# Altium PCB 5111HB015.pcbdoc (part 1 of 2)
Units mm, origin at the board's own origin, x right, y up, seen from the top; angles counter-clockwise.
Board outline 113.23 x 111.63 mm, 4 copper layers (Top Layer, Top, MID1, MID2, Bottom Layer, Bottom), stack 1.189 mm thick; 90 components, 53 nets, 462 pads, 255 vias.
Unrouted connection lines stored in the file: 24.
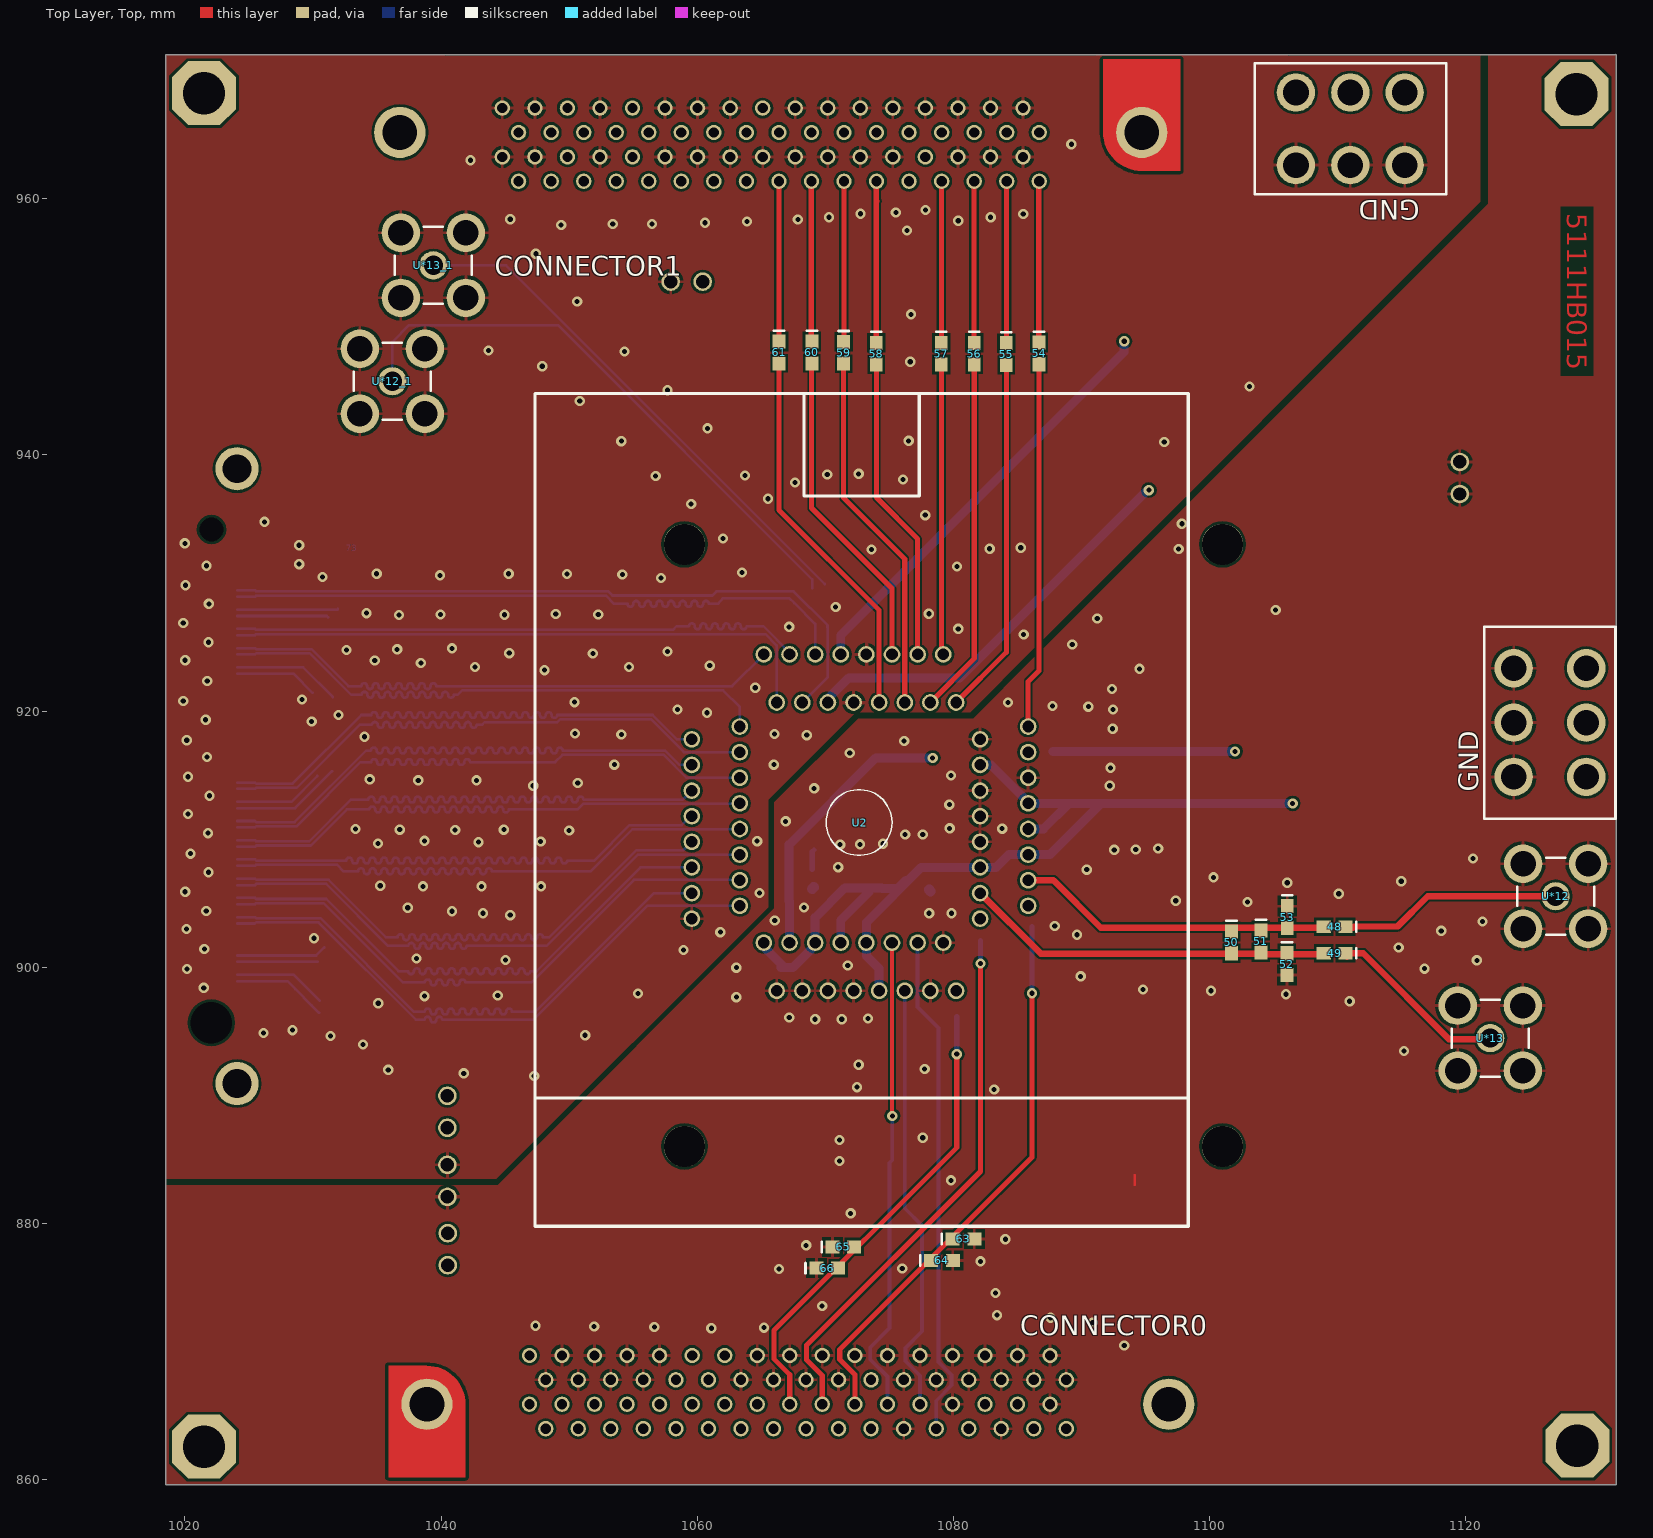
[diagram p0: Top Layer, Top view]
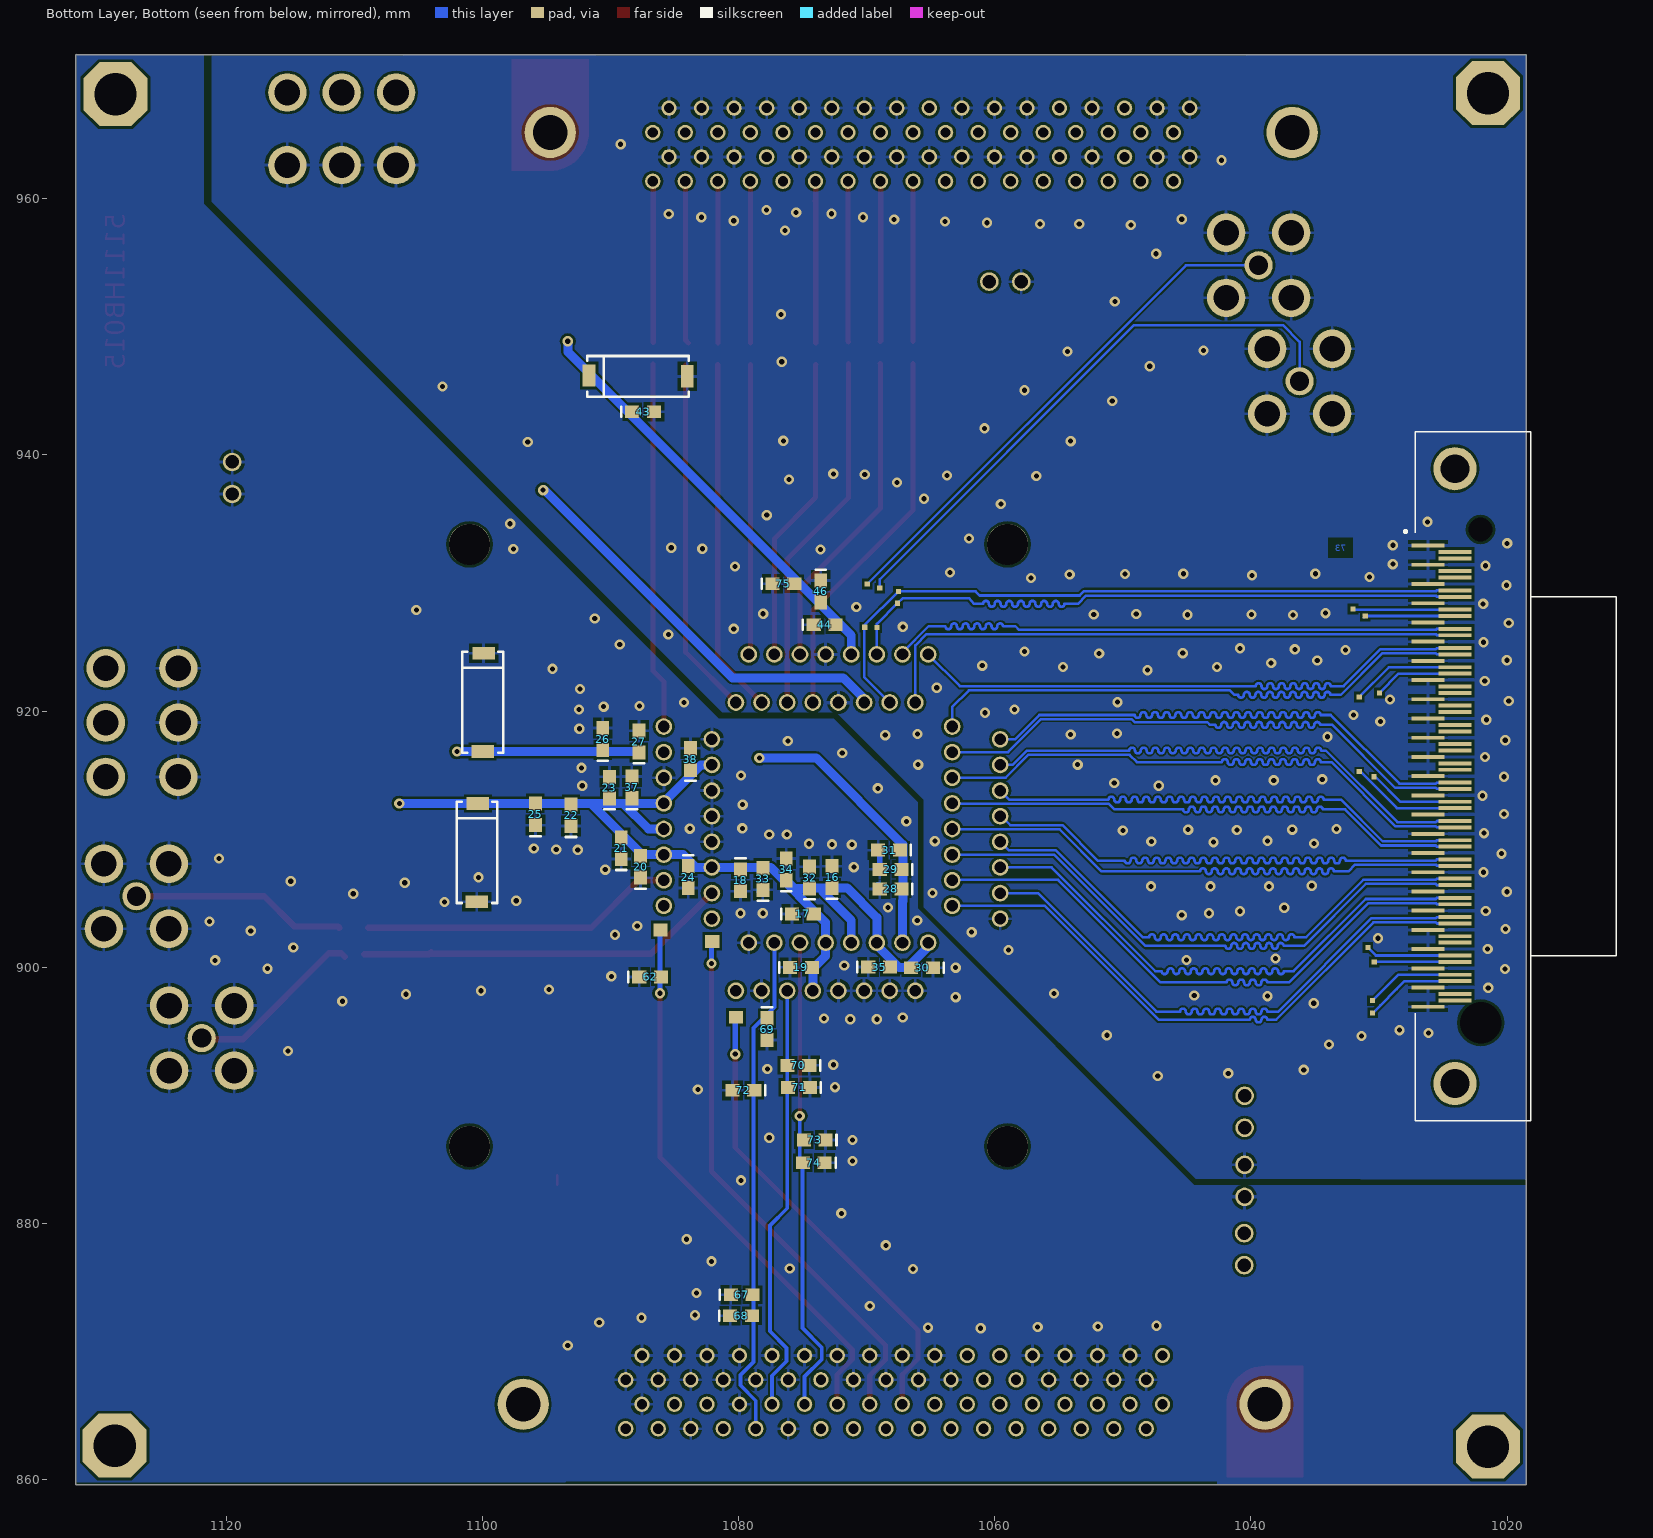
[diagram p1: Bottom Layer, Bottom view, seen from below]
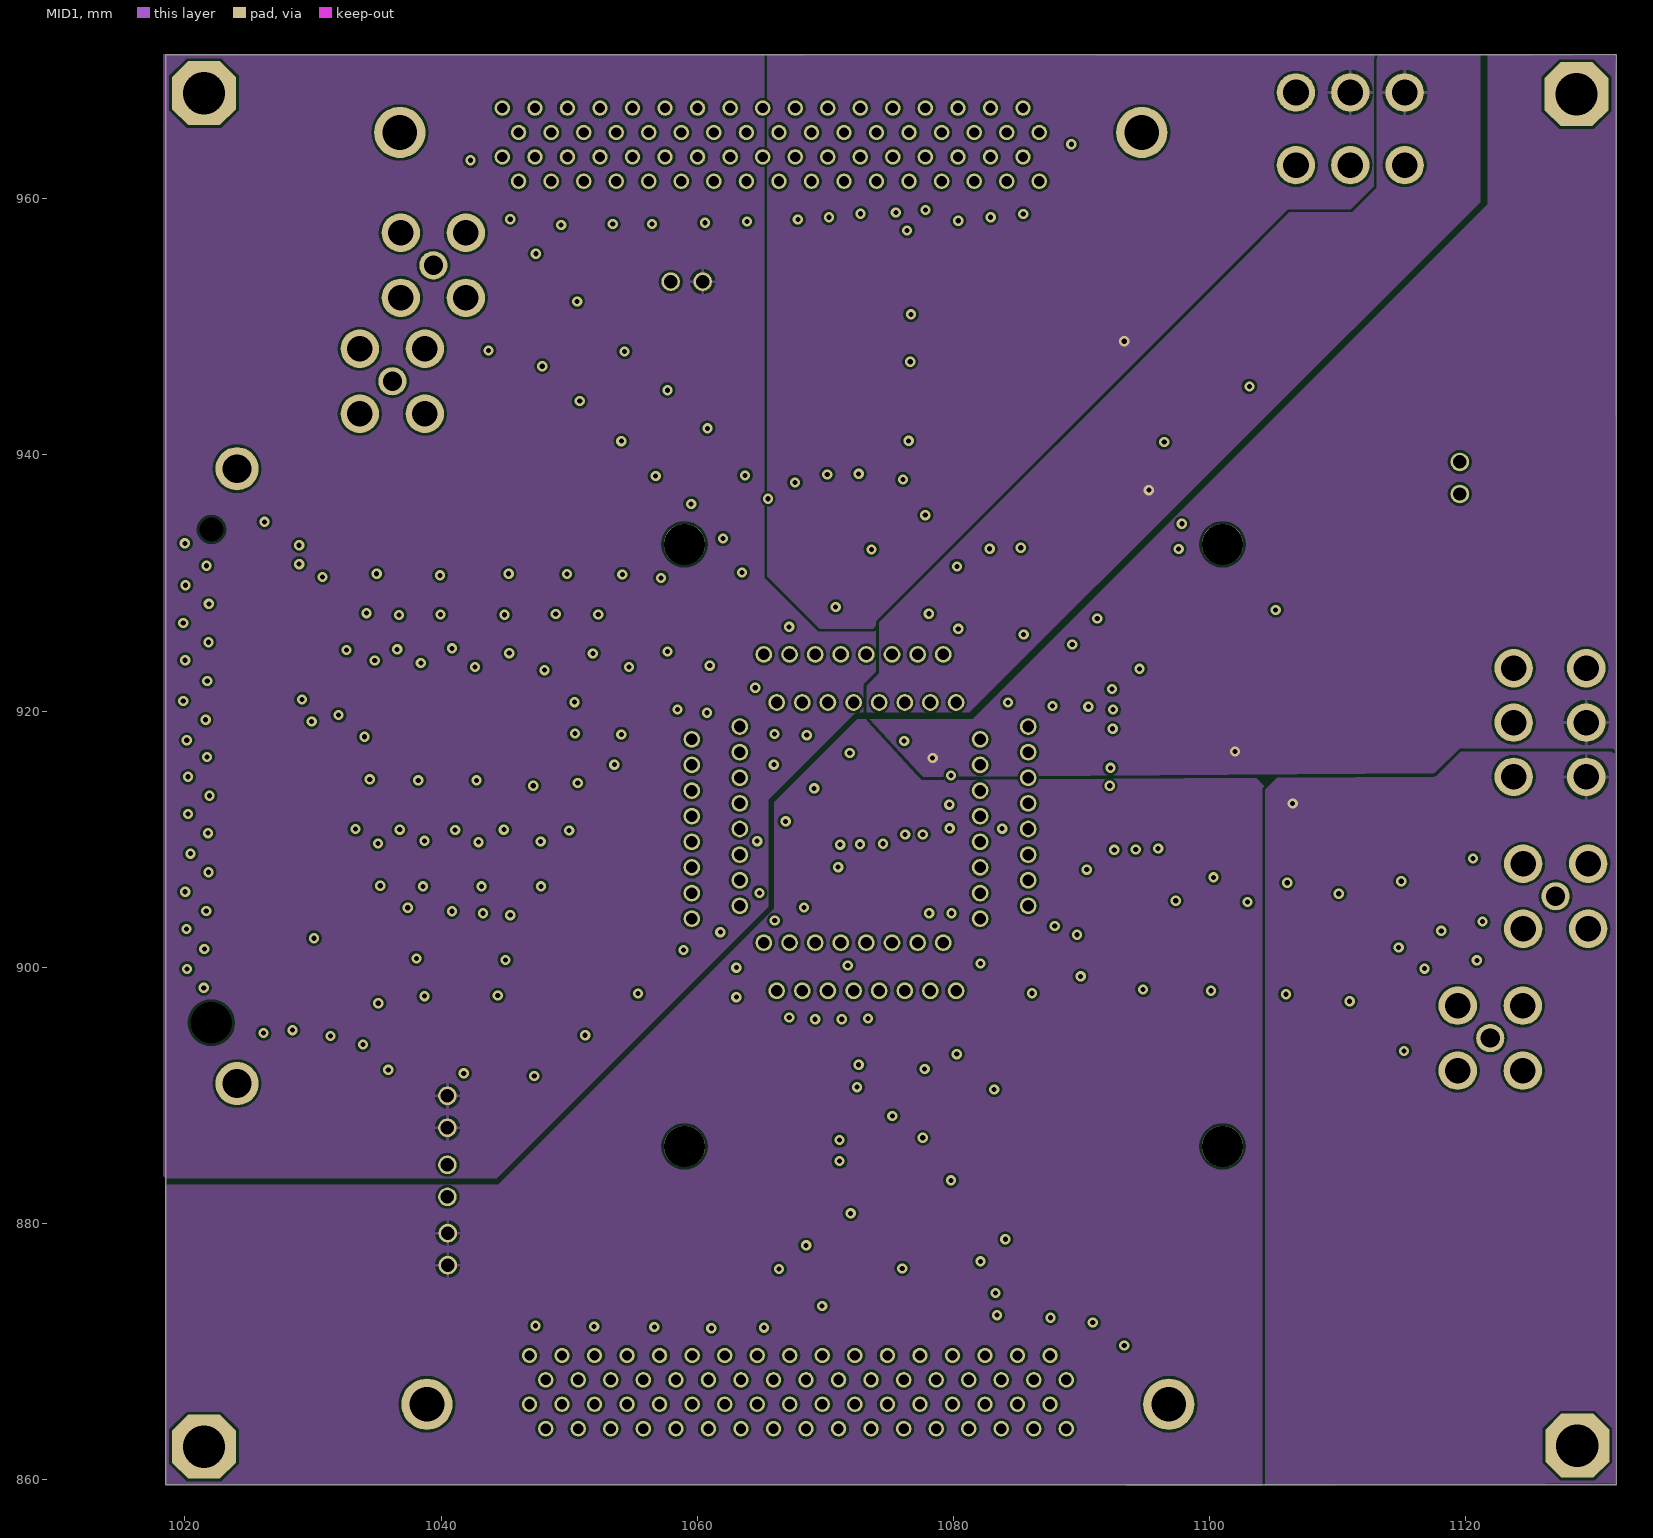
[diagram p2: MID1]
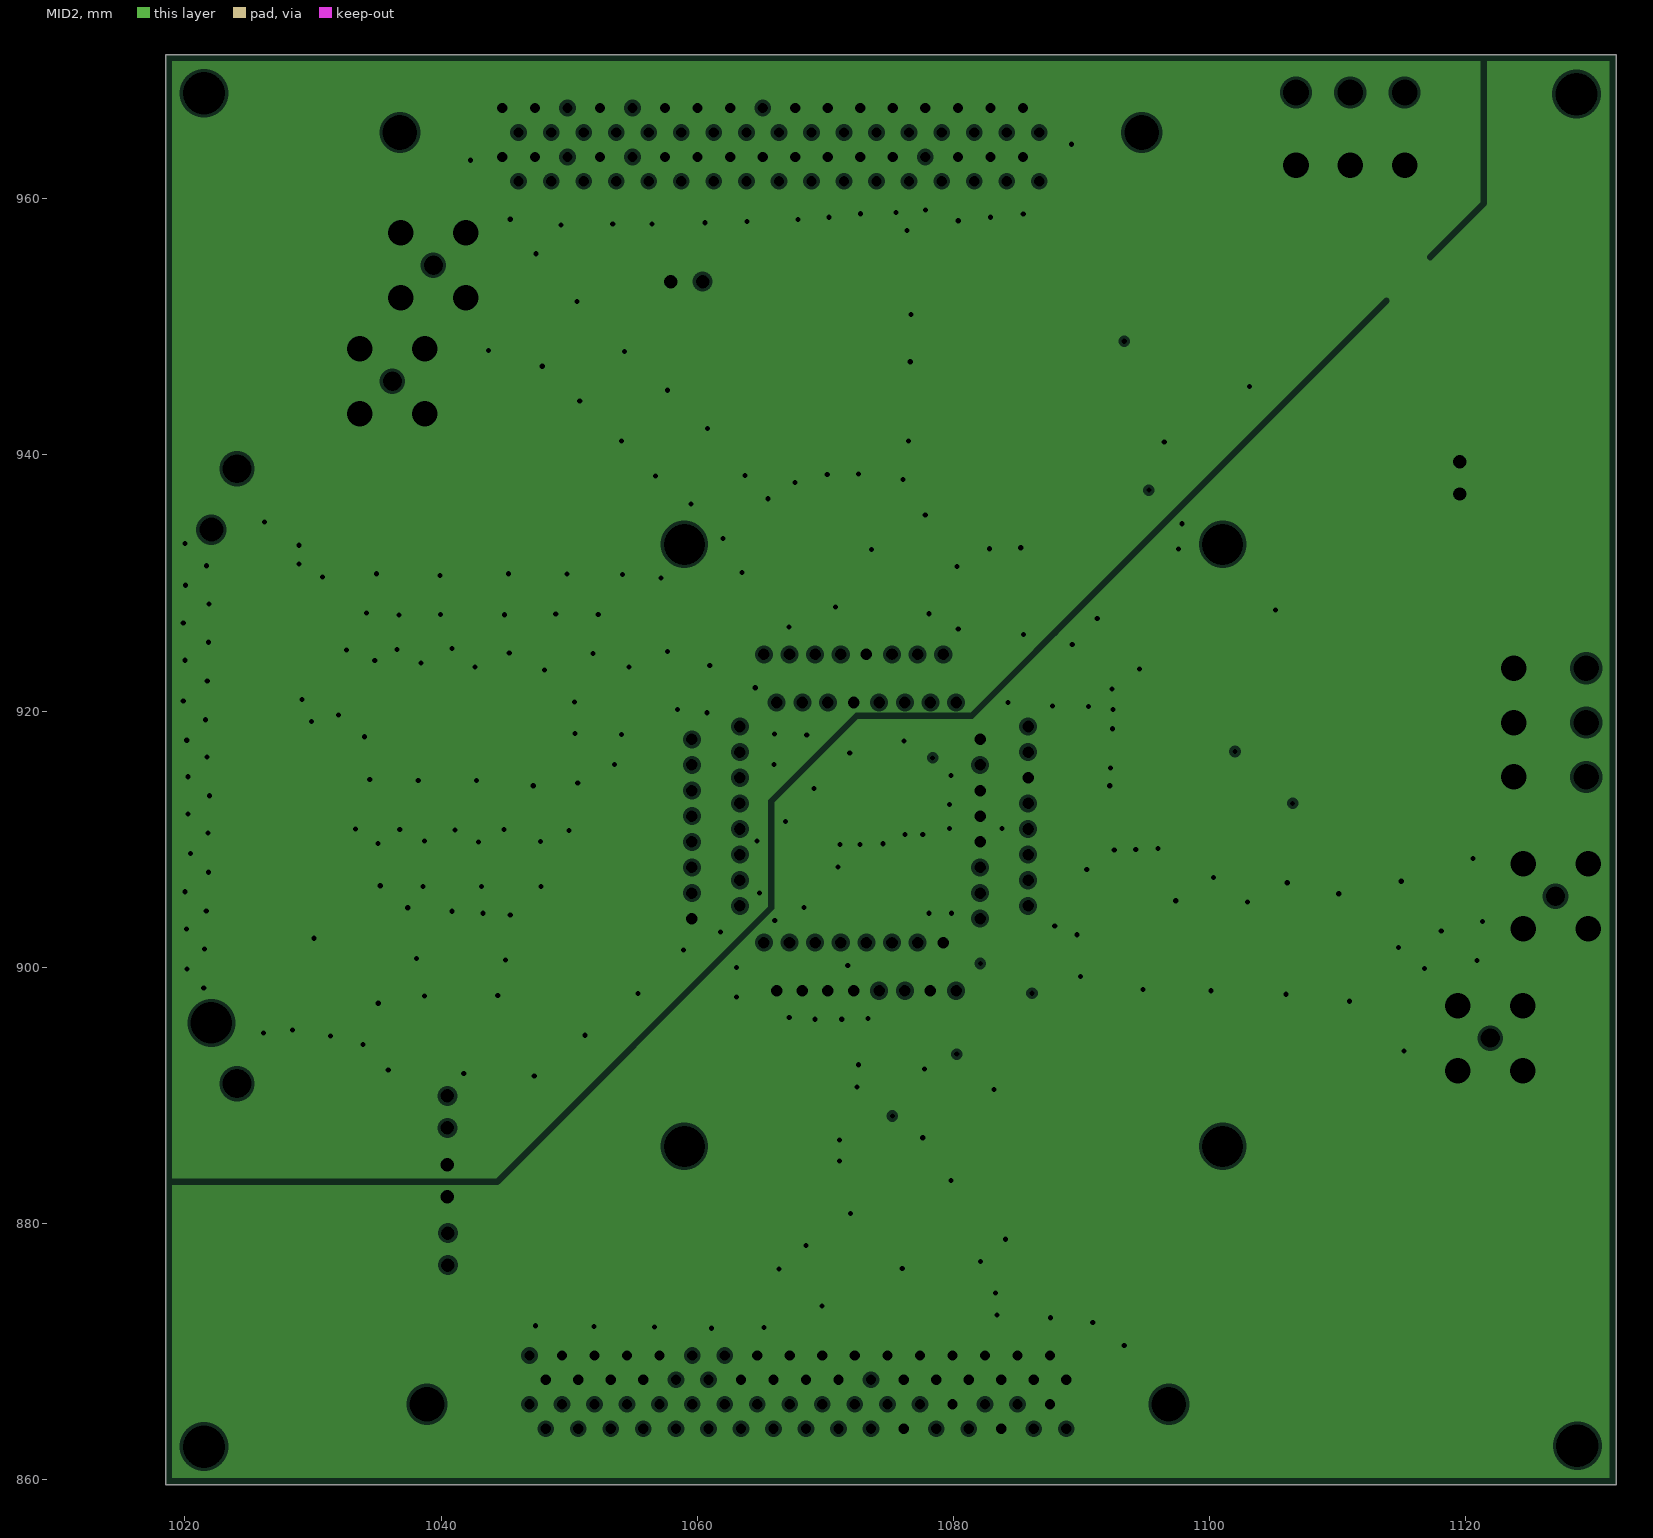
[diagram p3: MID2, clearances drawn from the general rule]

## Layer stack, top to bottom
Top Solder, Top Mask: solder mask 0.0102, Solder Resist, Dk 3.5
Top Layer, Top: signal copper 0.018
CORE1: core 0.7, FR-4, Dk 4.2
MID1: signal copper 0.036
Dielectric 3: prepreg 0.127, Dk 4.2
MID2: plane copper 0.036, net DGND
CORE2: core 0.254, FR-4, Dk 4.2
Bottom Layer, Bottom: signal copper 0.018
Bottom Solder, Bot Mask: solder mask 0.0102, Solder Resist, Dk 3.5

## Board outline
1018.5,859.62 1018.498,971.25 1131.723,971.25 1131.723,859.62

## Design rules (kind name [scope] priority, off if disabled: settings)
Clearance [All] p1: gap=0.254 except(0.125: Track-Track Track-Via; 0.13: Arc-Arc Arc-Track; 0.15: Arc-SMDPad Arc-THPad Arc-Via Arc-Fill Arc-Poly Arc-Region Track-SMDPad Track-THPad Track-Fill Track-Poly Track-Region SMDPad-SMDPad THPad-THPad THPad-Via; 0.2: SMDPad-Fill SMDPad-Poly SMDPad-Region THPad-Poly Via-Via Via-Poly Fill-Poly; 0.25: Poly-Poly)
DiffPairsRouting DiffPairs_ADC [InDifferentialPairClass('ADC_LVDS')] p1: maxlimit=0.25 minlimit=0.125 mostfreqgap=0.125 toplayer_minwidth=0.125 toplayer_maxwidth=0.2 toplayer_prefwidth=0.125 midlayer1_minwidth=0.125 midlayer1_maxwidth=0.2 midlayer1_prefwidth=0.125 bottomlayer_minwidth=0.125 bottomlayer_maxwidth=0.2 bottomlayer_prefwidth=0.125 maxuncoupledlength=12.7
Length "InNet('D0_1_M  / CMS1')_1" [InNet('D0_1_M  / CMS1')] p1: maxlimit=47.105 minlimit=0
Length "InNet('D0_1_M  / CMS1')" [InNet('D0_1_M  / CMS1')] p2: maxlimit=47.105 minlimit=0
MatchedLengths MatchedLengths_1 [InDifferentialPairClass('ADC_LVDS')] p1: tolerance=1 checknetsindiffpair=TRUE checkdiffpairvsdiffpair=FALSE checkxsignals=FALSE checkothers=FALSE
MatchedLengths [InDifferentialPairClass('ADC_LVDS')] p2: tolerance=1 checknetsindiffpair=FALSE checkdiffpairvsdiffpair=TRUE checkxsignals=TRUE checkothers=TRUE
PlaneClearance [All] p1: clearance=0.254
PlaneConnect PlaneConnect_1 [All] p1: planeconnectstyle=Relief reliefexpansion=0.508 reliefentries=4 reliefconductorwidth=0.254 reliefairgap=0.254
PolygonConnect PolygonConnect_isVia [IsVia] p1: connectstyle=Direct reliefconductorwidth=0.254 reliefentries=4 polygonreliefangle="90 Angle" airgapwidth=0.254
PolygonConnect PolygonConnect_5 [All] p2: connectstyle=Relief reliefconductorwidth=0.254 reliefentries=4 polygonreliefangle="90 Angle" airgapwidth=0.254
PolygonConnect PolygonConnect_4 [IsPolygon And InNet('GND') And OnLayer('Bottom Layer, Bottom') vs IsVia] p3: connectstyle=Relief reliefconductorwidth=0.381 reliefentries=4 polygonreliefangle="90 Angle" airgapwidth=0.254
PolygonConnect PolygonConnect_3 [IsPolygon And InNet('GND') And OnLayer('Bottom Layer, Bottom') vs IsPad] p4: connectstyle=Relief reliefconductorwidth=0.3 reliefentries=4 polygonreliefangle="90 Angle" airgapwidth=0.254
PolygonConnect PolygonConnect_2 [IsPolygon And InNet('GND') And OnLayer('Top Layer, Top') vs IsVia] p5: connectstyle=Relief reliefconductorwidth=0.381 reliefentries=4 polygonreliefangle="90 Angle" airgapwidth=0.254
PolygonConnect PolygonConnect_1 [IsPolygon And InNet('GND') And OnLayer('Top Layer, Top') vs IsPad] p6: connectstyle=Relief reliefconductorwidth=0.3 reliefentries=4 polygonreliefangle="90 Angle" airgapwidth=0.254
RoutingVias [All] p1: holewidth=0.3 width=0.6 viastyle="Through Hole" minholewidth=0.3 minwidth=0.6 maxholewidth=0.7 maxwidth=1.2
SolderMaskExpansion [All] p1: expansion=0.102
Width [All] p1: maxlimit=0.8 minlimit=0.1 preferedwidth=0.4
27 further rules are at their usual default settings.

## Classes and differential pairs
differential pair class ADC_LVDS: CLK CLK_1 D0-1 D2-3 D4-5 D6-7 D8-9 D10-11 D12-13 D14-15 DRY
differential pair DRY: +"DRY_P  / CMSCLK" -"DRY_M  / DLL_PG"
differential pair D0-1: +"D0_1_P  / CMS0" -"D0_1_M  / CMS1"
differential pair D2-3: +"D2_3_P   / CMS2" -"D2_3_M / CMS3"
differential pair D4-5: +"D4_5_P   / CMS4" -"D4_5_M   / CMS5"
differential pair D6-7: +"D6_7_P   / CMS6" -"D6_7_M   / CMS7"
differential pair D8-9: +"D8_9_P  / CMS8" -"D8_9_M  / CMS9"
differential pair D10-11: +"D10_11_P  / CMS10" -"D10_11_M  / CMS11"
differential pair D12-13: +"D12_13_P  / CMS12" -"D12_13_M  / CMS13"
differential pair D14-15: +"D14_15_P  / CMS14" -"D14_15_M  / CMS15"
differential pair CLK: +CLKP -CLKM
differential pair CLK_1: +CLKP_1 -CLKM_1

## Components (designator, comment, footprint, x,y, rotation, side; value= is the part's Value field where it differs from the comment)
16 "" CC1608-0603 1072.7,907.05 r90 bottom
17 "" CC1608-0603 1074.975,904.175 r180 bottom
18 "" CC1608-0603 1079.85,906.8 r270 bottom
19 "" CC1608-0603 1075.125,900 r180 bottom
20 "" CC1608-0603 1087.65,907.85 r90 bottom
21 "" CC1608-0603 1089.15,909.3 r90 bottom
22 "" CC1608-0603 1093.075,911.875 r90 bottom
23 "" CC1608-0603 1090.075,914.025 r90 bottom
24 "" CC1608-0603 1083.927,907.046 r270 bottom
25 "" CC1608-0603 1095.85,911.95 r90 bottom
26 "" CC1608-0603 1090.6,917.825 r90 bottom
27 "" CC1608-0603 1087.775,917.628 r90 bottom
28 "" CC1608-0603 1068.125,906.125 r0 bottom
29 "" CC1608-0603 1068.125,907.65 r0 bottom
30 "" CC1608-0603 1065.675,899.975 r0 bottom
31 "" CC1608-0603 1068.25,909.15 r0 bottom
32 "" CC1608-0603 1074.45,907 r90 bottom
33 "" CC1608-0603 1078.1,906.9 r90 bottom
34 "" CC1608-0603 1076.275,907.65 r90 bottom
35 "" CC1608-0603 1069.025,900.025 r180 bottom
37 "" CC1608-0603 1088.325,914.05 r90 bottom
38 "" CC1608-0603 1083.75,916.25 r90 bottom
43 "" CC1608-0603 1087.45,943.375 r180 bottom
44 "" CC1608-0603 1073.275,926.75 r180 bottom
46 "" CC1608-0603 1073.575,929.35 r270 bottom
48 "" CC1608-0603 1109.75,903.175 r180 top
49 "" CC1608-0603 1109.75,901.1 r180 top
50 "" CC1608-0603 1101.7,901.95 r270 top
51 "" CC1608-0603 1104,902.025 r270 top
52 "" CC1608-0603 1106.025,900.25 r270 top
53 "" CC1608-0603 1106.05,903.925 r270 top
54 "" CC1608-0603 1086.675,947.925 r270 top
55 "" CC1608-0603 1084.125,947.875 r270 top
56 "" CC1608-0603 1081.625,947.9 r270 top
57 "" CC1608-0603 1079.05,947.9 r270 top
58 "" CC1608-0603 1073.975,947.9 r270 top
59 "" CC1608-0603 1071.425,947.975 r270 top
60 "" CC1608-0603 1068.95,948 r270 top
61 "" CC1608-0603 1066.385,948 r270 top
62 "" CC1608-0603 1086.9,899.25 r180 bottom
63 "" CC1608-0603 1080.775,878.8 r0 top
64 "" CC1608-0603 1079.1,877.125 r0 top
65 "" CC1608-0603 1071.4,878.175 r0 top
66 "" CC1608-0603 1070.15,876.525 r0 top
67 "" CC1608-0603 1079.75,874.45 r180 bottom
68 "" CC1608-0603 1079.8,872.8 r180 bottom
69 "" CC1608-0603 1077.775,895.175 r270 bottom
70 "" CC1608-0603 1075.325,892.35 r0 bottom
71 "" CC1608-0603 1075.275,890.625 r0 bottom
72 "" CC1608-0603 1079.625,890.4 r0 bottom
73 "" CC1608-0603 1074.05,886.525 r0 bottom
74 "" CC1608-0603 1074.125,884.75 r0 bottom
75 "" CC1608-0603 1076.5,929.95 r180 bottom
CONNECTOR0 "FPGA_CONNECTOR" FPGA_CONNECTOR_ANGLE 1096.81,865.895 r180 top
CONNECTOR1 "FPGA_CONNECTOR" FPGA_CONNECTOR_ANGLE 1036.785,965.17 r0 top (schematic designator CONNECTOR0)
U2 "" 邮64-4(T) 1073.2,901.925 r0 top
U*12 "" 919-109J 1127,905.55 r0 top
U*12_1 "" 919-109J 1036.2,945.75 r0 top
U*13 "" 919-109J 1121.9,894.475 r0 top
U*13_1 "" 919-109J 1039.4,954.8 r0 top
? "Comment" PAD_mini 1030.675,901.35 r0 bottom
? "Comment" PAD_mini 1030.175,900.225 r0 bottom
? "Comment" PAD_mini 1030.175,921.225 r90 bottom
? "Comment" PAD_mini 1031.35,920.9 r0 bottom
? "Comment" PAD_mini 1030.2,914.675 r0 bottom
? "Comment" PAD_mini 1031.35,915.075 r0 bottom
? "Comment" "Power Connector" 1115.217,962.625 r90 top
? "Comment" CAP_TANTAL 1100.325,907.025 r0 bottom
? "Comment" CAP_TANTAL 1099.875,918.75 r0 bottom
? "Comment" FCN-268D024-G/10-R@FUJITSU 1027.18,888.001 r90 bottom
? "Comment" "Power Connector" 1123.725,914.866 r0 top
? "Comment" PAD_mini 1069.75,929.725 r0 bottom
? "Comment" PAD_mini 1068.775,929.4 r0 bottom
? "Comment" PAD_mini 1069,926.325 r0 bottom
? "Comment" PAD_mini 1069.95,926.35 r0 bottom
? "Comment" pad 1079.6,895.5 r90 bottom
? "Comment" pad 1081.45,901.425 r90 bottom
? "Comment" pad 1085.475,902.325 r90 bottom
? "Comment" CAP_TANTAL 1085.9,946.225 r270 bottom
? "Comment" PAD_mini 1067.375,928.225 r0 bottom
? "Comment" PAD_mini 1067.322,929.15 r0 bottom
? "Comment" pin_2.54mm_1x2 1033.1,885.284 r270 top
? "Comment" pin_2.54mm_1x2 1033.125,879.95 r270 top
? "Comment" pin_2.54mm_1x2 1033.1,890.675 r270 top
? "Comment" pin_2.54mm_1x2 1057.225,946.125 r0 top
? "Comment" pin_2.54mm_1x2 1112.125,940.15 r270 top
? "Comment" PAD_mini 1031.832,927.775 r0 bottom
? "Comment" PAD_mini 1030.875,927.225 r0 bottom
? "Comment" PAD_mini 1030.325,897.2 r0 bottom
? "Comment" PAD_mini 1030.3,896.25 r0 bottom

## Footprints (in the part's own frame and the unit in brackets; to place one, negate y for a bottom-side part, rotate by r counter-clockwise, add the part's x,y. Pads: shape width x height; smd on the part's side, far side on the other; paste and mask are expansions set on the pad)
919-109J [mm]
  round 2.2 hole 1.5: 1(0,0)
  round 3 hole 2: 2(-2.54,-2.54) 3(2.54,-2.54) 4(2.54,2.54) 5(-2.54,2.54)
  silkscreen extent -3,-3 3,3
CAP_TANTAL [mm]
  rect 1.75x1 smd: 1(0.1,1.9) 2(0.025,-5.765)
  silkscreen extent -1.5,-5.89 1.68,2
CC1608-0603 [mm]
  rect 1.1x1 smd: 1(-0.85,0) 2(0.85,0)
  silkscreen extent -1.7,-0.4 -1.7,0.4
FCN-268D024-G/10-R@FUJITSU [mm]
  rect 0.305x2.6 smd: G1(44.924,-1.005) G2(43.424,-1.005) G3(41.924,-1.005) G4(40.424,-1.005) G5(38.924,-1.005) G6(37.424,-1.005) G7(35.924,-1.005) G8(34.424,-1.005) G9(32.924,-1.005) G10(31.424,-1.005) G11(29.924,-1.005) G12(28.424,-1.005) G13(26.924,-1.005) G14(25.424,-1.005) G15(23.924,-1.005) G16(22.424,-1.005) G17(20.924,-1.005) G18(19.424,-1.005) G19(17.924,-1.005) G20(16.424,-1.005) G21(14.924,-1.005) G22(13.424,-1.005) G23(11.924,-1.005) G24(10.424,-1.005) G25(8.924,-1.005) S1(44.424,-3.105) S2(43.924,-3.105) S3(42.924,-3.105) S4(42.424,-3.105) S5(41.424,-3.105) S6(40.924,-3.105) S7(39.924,-3.105) S8(39.424,-3.105) S9(38.424,-3.105) S10(37.924,-3.105) S11(36.924,-3.105) S12(36.424,-3.105) S13(35.424,-3.105) S14(34.924,-3.105) S15(33.924,-3.105) S16(33.424,-3.105) S17(32.424,-3.105) S18(31.924,-3.105) S19(30.924,-3.105) S20(30.424,-3.105) S21(29.424,-3.105) S22(28.924,-3.105) S23(27.924,-3.105) S24(27.424,-3.105) S25(26.424,-3.105) S26(25.924,-3.105) S27(24.924,-3.105) S28(24.424,-3.105) S29(23.424,-3.105) S30(22.924,-3.105) S31(21.924,-3.105) S32(21.424,-3.105) S33(20.424,-3.105) S34(19.924,-3.105) S35(18.924,-3.105) S36(18.424,-3.105) S37(17.424,-3.105) S38(16.924,-3.105) S39(15.924,-3.105) S40(15.424,-3.105) S41(14.424,-3.105) S42(13.924,-3.105) S43(12.924,-3.105) S44(12.424,-3.105) S45(11.424,-3.105) S46(10.924,-3.105) S47(9.924,-3.105) S48(9.424,-3.105)
  round 3.375 hole 2.25: MH1(2.924,-3.105) MH2(50.924,-3.105)
  round 0.935 hole 1.87 unplated: MH3(46.174,-5.105)
  round 0.935 hole 3.24 unplated: MH4(7.674,-5.105)
  silkscreen extent 0.02,-15.71 53.82,0.84
FPGA_CONNECTOR_ANGLE [mm]
  round 1.2 hole 0.8: 1(49.91,-3.81) 2(48.64,-1.905) 3(47.37,-3.81) 4(46.1,-1.905) 5(44.83,-3.81) 6(43.56,-1.905) 7(42.29,-3.81) 8(41.02,-1.905) 9(39.75,-3.81) 10(38.48,-1.905) 11(37.21,-3.81) 12(35.94,-1.905) 13(34.67,-3.81) 14(33.4,-1.905) 15(32.13,-3.81) 16(30.86,-1.905) 17(29.59,-3.81) 18(28.32,-1.905) 19(27.05,-3.81) 20(25.78,-1.905) 21(24.51,-3.81) 22(23.24,-1.905) 23(21.97,-3.81) 24(20.7,-1.905) 25(19.43,-3.81) 26(18.16,-1.905) 27(16.89,-3.81) 28(15.62,-1.905) 29(14.35,-3.81) 30(13.08,-1.905) 31(11.81,-3.81) 32(10.54,-1.905) 33(9.27,-3.81) 34(8,-1.905) 35(49.91,0) 36(48.64,1.905) 37(47.37,0) 38(46.1,1.905) 39(44.83,0) 40(43.56,1.905) 41(42.29,0) 42(41.02,1.905) 43(39.75,0) 44(38.48,1.905) 45(37.21,0) 46(35.94,1.905) 47(34.67,0) 48(33.4,1.905) 49(32.13,0) 50(30.86,1.905) 51(29.59,0) 52(28.32,1.905) 53(27.05,0) 54(25.78,1.905) 55(24.51,0) 56(23.24,1.905) 57(21.97,0) 58(20.7,1.905) 59(19.43,0) 60(18.16,1.905) 61(16.89,0) 62(15.62,1.905) 63(14.35,0) 64(13.08,1.905) 65(11.81,0) 66(10.54,1.905) 67(9.27,0) 68(8,1.905)
  round 4 hole 2.7: 70(0,0) 72(57.91,0)
  Top Layer, Top region: 57.91,-3 56.762,-2.772 55.789,-2.121 55.138,-1.148 54.91,0 54.91,0 54.91,5.705 60.91,5.705 60.91,-3
  body extent -3,-5.08 60.91,12.22, height 10.25
pad [mm]
  rect 1x1.1 smd: 1(0.6,0.6)
PAD_mini [mm]
  rect 0.4x0.4 smd: 1(0.2,-0.2)
pin_2.54mm_1x2 [mm]
  round 1.45 hole 1.05: 0(0.7,7.4) 1(3.2,7.4)
  body extent -0.56,6.2 4.52,8.74, height 9.29
"Power Connector" [mm] "6 way r/a PCB header w/peg,Mini-Fit Jr"
  round 3 hole 2: 1(5.664,0) 2(5.664,4.242) 3(5.664,8.484) 4(0,0) 5(0,4.242) 6(0,8.484)
  silkscreen extent -2.29,-3.25 7.95,11.71, body extent -0.35,-2.73 19.58,11.47, height 11.4
邮64-4(T) [mm]
  round 1.3 hole 0.9: 1(0,0) 2(1,-3.75) 3(2,0) 4(3,-3.75) 5(4,0) 6(5,-3.75) 7(6,0) 8(7,-3.75) 9(8.875,1.875) 10(12.625,2.875) 11(8.875,3.875) 12(12.625,4.875) 13(8.875,5.875) 14(12.625,6.875) 15(8.875,7.875) 16(12.625,8.875) 17(8.875,9.875) 18(12.625,10.875) 19(8.875,11.875) 20(12.625,12.875) 21(8.875,13.875) 22(12.625,14.875) 23(8.875,15.875) 24(12.625,16.875) 25(7,18.75) 26(6,22.5) 27(5,18.75) 28(4,22.5) 29(3,18.75) 30(2,22.5) 31(1,18.75) 32(0,22.5) 33(-1,18.75) 34(-2,22.5) 35(-3,18.75) 36(-4,22.5) 37(-5,18.75) 38(-6,22.5) 39(-7,18.75) 40(-8,22.5) 41(-9.875,16.875) 42(-13.625,15.875) 43(-9.875,14.875) 44(-13.625,13.875) 45(-9.875,12.875) 46(-13.625,11.875) 47(-9.875,10.875) 48(-13.625,9.875) 49(-9.875,8.875) 50(-13.625,7.875) 51(-9.875,6.875) 52(-13.625,5.875) 53(-9.875,4.875) 54(-13.625,3.875) 55(-9.875,2.875) 56(-13.625,1.875) 57(-8,0) 58(-7,-3.75) 59(-6,0) 60(-5,-3.75) 61(-4,0) 62(-3,-3.75) 63(-2,0) 64(-1,-3.75)
  silkscreen extent -25.88,-22.13 25.12,42.87

## Free pads (board coordinates)
  round 3.2 hole 3.2 unplated: 0(1059,886.025) 0(1059,933.025) 0(1101,886.025) 0(1101,933.025)
  oct 5x5 hole 3.3: 5(1021.5,862.589) 5(1021.5,968.239) 5(1128.625,968.164) 5(1128.7,862.664)

## Via types
v1: diameter 0.8, hole 0.4, Top Layer, Top to Bottom Layer, Bottom, tented both sides, 255 vias

## Nets (pads, with @x,y where several pads share a name; then routed paths per layer and width w, separated by ;. In a path a pad name is that pad's centre, name@x,y a point inside that pad or via, vN(x,y) a via of type N, cw(c..) or ccw(c..) an arc to the next point about the centre after c; other vN are vias at no path point)
1: ?.1@1029.975,921.425 ?.1@1031.55,921.1 ?.S13 ?.S14 | length 15
  Bottom Layer, Bottom w0.2: ?.S14@1024.075,922.925 1028.475,922.925 ?.1@1029.975,921.425 ; ?.S13@1024.075,923.425 1029.225,923.425 ?.1@1031.55,921.1
73: ?.1@1030.4,914.875 ?.1@1030.5,896.45 ?.1@1030.375,900.425 ?.1@1030.525,897.4 ?.1@1030.875,901.55 ?.1@1031.55,915.275 ?.1@1031.075,927.425 ?.1@1032.032,927.975 ?.S7 ?.S8 ?.S27 ?.S28 ?.S43 ?.S44 ?.S45 ?.S46 | length 58.9
  Bottom Layer, Bottom w0.2: ?.S46@1024.075,898.925 1028.005,898.925 1028.632,898.298 1028.636,898.298 1029.9,897.034 1029.9,897.03 1030.48,896.45 ?.1@1030.5,896.45 ; ?.S45@1024.075,899.425 1028.5,899.425 ?.1@1030.525,897.4 ; ?.S44@1024.075,900.425 ?.1@1030.375,900.425 ; ?.S43@1024.075,900.925 1030.25,900.925 ?.1@1030.875,901.55 ; ?.S28@1024.075,912.425 1028.6,912.425 ?.1@1031.5,915.325 ; ?.S27@1024.075,912.925 1028.325,912.925 ?.1@1030.337,914.937 ; ?.S8@1024.075,927.425 ?.1@1031.075,927.425 ?.1@1031.175,927.325 ; ?.S7@1024.075,927.925 1031.925,927.925 ?.1@1031.925,927.975
AGND: 
AGND_A: 
AGND_A_B: 
AGND_B: 
AGND_buf: 
AGND_C_BUF: 
AGND_YBX: 
AVCC_+2,5V: 16.1 17.2 18.1 19.2 20.2 21.2 22.2 23.1 24.1 25.2 30.2 32.1 33.2 34.1 35.2 37.1 38.1 ?.1@1129.389,914.866 ?.2@1100.35,912.79 U2.1 U2.2 U2.13 U2.14 U2.16 U2.18 U2.21 U2.57 U2.61 U2.63 | length 79
  Bottom Layer, Bottom w0.5: U2.2@1074.2,898.175 1074.2,898.825 ; U2.18@1085.825,912.8 U2.18@1085.825,912.9
  Bottom Layer, Bottom w0.7: U2.57@1065.2,901.925 1065.2,901.625 30.2@1066.8,900.025 ; 30.2@1066.525,899.975 1067.45,899.975 1069.2,901.725 U2.61@1069.2,901.925 1069.2,903.875 1071.525,906.2 16.1@1072.7,906.2 1074.4,906.2 32.1@1074.45,906.15 1075.625,906.15 34.1@1076.275,906.8 ; U2.63@1071.2,901.925 1071.2,903.675 1073.425,905.9 ; 1074.2,898.825 1074.2,899.9 1073.2,900.9 U2.1@1073.2,901.925 1073.2,903.5 1077.5,907.8 U2.13@1082.075,907.8 1083.325,907.8 1084.325,908.8 U2.14@1085.825,908.8 1087.525,908.8 1091.525,912.8 ; U2.21@1082.075,915.8 1082.925,915.8 U2.18@1085.825,912.9 ; U2.16@1085.825,910.8 1087.025,910.8 1089.025,912.8 ; U2.18@1085.825,912.8 1089.025,912.8 ; v1(1106.475,912.8) 1100.35,912.8 1091.525,912.8 ; 1089.025,912.8 1091.525,912.8
AVDD_1,2V: 26.1 27.1 28.1 29.1 31.1 ?.1@1099.975,916.85 ?.2@1129.389,919.108 U2.59 | length 35.9
  Bottom Layer, Bottom w0.7: U2.59@1067.2,901.925 1067.2,905.2 1067.175,905.175 1067.175,909.575 1073.95,916.35 v1(1078.375,916.35) ; 27.1@1087.775,916.85 ?.1@1099.975,916.85 v1(1101.975,916.85)
BUFMODE0: 57.1 57.2 CONNECTOR1.7 U2.26 | length 35.2
  Top Layer, Top w0.4: U2.26@1079.05,924.475 57.2@1079.05,947.05 ; 57.1@1079.05,948.75 CONNECTOR1.7@1079.05,961.36
BUFMODE1: 55.1 55.2 CONNECTOR1.3 U2.25 | length 40.7
  Top Layer, Top w0.4: U2.25@1080.2,920.675 1084.125,924.6 55.2@1084.125,947.025 ; 55.1@1083.9,948.725 1084.14,948.965 CONNECTOR1.3@1084.14,961.36
CLKM: ?.1@1067.522,929.35 ?.1@1070.15,926.55 ?.S5 U2.37 | length 54.4
  Bottom Layer, Bottom w0.2: ?.S5@1024.075,929.425 1025.475,929.425 1025.527,929.373 1053.027,929.373 1053.375,929.025 1061.175,929.025 1061.5,929.35 ?.1@1067.522,929.35 1070.15,926.722 ?.1@1070.15,926.55 ; U2.37@1068.2,920.675 1070.2,922.675 ?.1@1070.2,926.66
CLKM_1: ?.1@1069.95,929.925 U*13_1.1 | length 40.9
  Bottom Layer, Bottom w0.2: U*13_1.1@1039.4,954.8 1045.075,954.8 ?.1@1069.95,929.925
CLKP: ?.1@1067.575,928.425 ?.1@1069.2,926.525 ?.S6 U2.36 | length 52.5
  Bottom Layer, Bottom w0.2: ?.S6@1024.075,928.925 1025.475,928.925 1025.562,929.012 1052.872,929.012 1053.509,928.375 1054.1,928.375 1054.554,928.375 ccw(c1054.781,928.375) 1055.008,928.375 cw(c1055.235,928.375) 1055.462,928.375 ccw(c1055.689,928.375) 1055.916,928.375 cw(c1056.143,928.375) 1056.37,928.375 ccw(c1056.597,928.375) 1056.824,928.375 cw(c1057.051,928.375) 1057.278,928.375 ccw(c1057.505,928.375) 1057.732,928.375 cw(c1057.959,928.375) 1058.186,928.375 ccw(c1058.413,928.375) 1058.64,928.375 cw(c1058.867,928.375) 1059.094,928.375 ccw(c1059.321,928.375) 1059.548,928.375 cw(c1059.775,928.375) 1060.002,928.375 ccw(c1060.229,928.375) 1060.456,928.375 cw(c1060.683,928.375) 1060.91,928.375 1061.364,928.375 1061.368,928.375 1061.606,928.375 1062.013,928.825 1067.175,928.825 ?.1@1067.575,928.425 1069.2,926.8 ?.1@1069.2,926.525 U2.36@1069.2,924.425
CLKP_1: ?.1@1068.975,929.6 U*12_1.1 | length 45.3
  Bottom Layer, Bottom w0.2: U*12_1.1@1036.2,945.75 1036.2,948.825 1037.5,950.125 1049.135,950.125 1068.975,930.285 ?.1@1068.975,929.6
CODE_IB: 60.1 60.2 CONNECTOR1.15 U2.30 | length 37.9
  Top Layer, Top w0.4: CONNECTOR1.15@1068.9,961.36 1068.9,948.9 60.1@1068.95,948.85 ; 60.2@1068.95,947.15 1068.925,947.125 1068.925,935.85 1075.2,929.575 U2.30@1075.2,924.425
"D0_1_M  / CMS1": ?.S39 ?.S41 U2.54 | length 46.8
  Bottom Layer, Bottom w0.2: ?.S39@1024.075,903.925 1025.475,903.925 1025.563,903.837 1030.572,903.837 1037.86,896.55 1038.725,896.55 cw(c1038.952,896.55) 1039.179,896.55 ccw(c1039.406,896.55) 1039.633,896.55 cw(c1039.86,896.55) 1040.087,896.55 ccw(c1040.314,896.55) 1040.541,896.55 cw(c1040.768,896.55) 1040.995,896.55 ccw(c1041.222,896.55) 1041.449,896.55 cw(c1041.676,896.55) 1041.903,896.55 ccw(c1042.13,896.55) 1042.357,896.55 cw(c1042.584,896.55) 1042.811,896.55 ccw(c1043.038,896.55) 1043.265,896.55 cw(c1043.492,896.55) 1043.719,896.55 ccw(c1043.946,896.55) 1044.173,896.55 cw(c1044.4,896.55) 1044.627,896.55 ccw(c1044.854,896.55) 1045.081,896.55 cw(c1045.308,896.55) 1045.535,896.55 1045.675,896.55 1047.375,896.55 1056.625,905.8 U2.54@1059.575,905.8 1059.255,905.48 U2.54@1059.22,905.48
"D0_1_P  / CMS0": ?.S40 ?.S42 U2.55 | length 46.8
  Bottom Layer, Bottom w0.2: ?.S40@1024.075,903.425 1025.475,903.425 1025.562,903.512 1030.438,903.512 1038.025,895.925 1038.725,895.925 cw(c1038.952,895.91) 1039.179,895.925 ccw(c1039.406,895.925) 1039.633,895.925 cw(c1039.86,895.91) 1040.087,895.925 1040.375,895.925 1047.21,895.925 1056.085,904.8 U2.55@1063.325,904.8
"D2_3_M / CMS3": ?.S37 U2.52 | length 46.7
  Bottom Layer, Bottom w0.2: ?.S37@1024.075,905.425 1025.475,905.425 1025.563,905.338 1031.037,905.338 1036.675,899.7 1036.975,899.7 1037.429,899.7 ccw(c1037.656,899.7) 1037.883,899.7 cw(c1038.11,899.7) 1038.337,899.7 ccw(c1038.564,899.7) 1038.791,899.7 cw(c1039.018,899.7) 1039.245,899.7 ccw(c1039.472,899.7) 1039.699,899.7 cw(c1039.926,899.7) 1040.153,899.7 ccw(c1040.38,899.7) 1040.607,899.7 cw(c1040.834,899.7) 1041.061,899.7 ccw(c1041.288,899.7) 1041.515,899.7 cw(c1041.742,899.7) 1041.969,899.7 ccw(c1042.196,899.7) 1042.423,899.7 cw(c1042.65,899.7) 1042.877,899.7 ccw(c1043.104,899.7) 1043.331,899.7 cw(c1043.558,899.7) 1043.785,899.7 ccw(c1044.012,899.7) 1044.239,899.7 cw(c1044.466,899.7) 1044.693,899.7 ccw(c1044.92,899.7) 1045.147,899.7 cw(c1045.374,899.7) 1045.601,899.7 ccw(c1045.828,899.7) 1046.055,899.7 cw(c1046.282,899.7) 1046.509,899.7 ccw(c1046.736,899.7) 1046.963,899.7 1047.417,899.7 1047.465,899.7 1047.47,899.705 1055.565,907.8 U2.52@1059.575,907.8
"D2_3_P   / CMS2": ?.S38 U2.53 | length 47.1
  Bottom Layer, Bottom w0.2: ?.S38@1024.075,904.925 1025.475,904.925 1025.563,905.013 1030.838,905.013 1037.025,898.825 1038.725,898.825 cw(c1038.952,898.818) 1039.179,898.825 ccw(c1039.406,898.825) 1039.633,898.825 cw(c1039.86,898.818) 1040.087,898.825 ccw(c1040.314,898.825) 1040.541,898.825 cw(c1040.768,898.818) 1040.995,898.825 ccw(c1041.222,898.825) 1041.449,898.825 cw(c1041.676,898.818) 1041.903,898.825 1042.35,898.825 1047.05,898.825 1055.05,906.825 U2.53@1063.3,906.825 ; U2.53@1063.225,906.9 U2.53@1063.3,906.825 ; U2.53@1063.325,906.8 U2.53@1063.3,906.825 ; U2.53@1063.325,906.825 U2.53@1063.3,906.825
"D4_5_M   / CMS5": ?.S35 U2.50 | length 46.9
  Bottom Layer, Bottom w0.2: ?.S35@1024.075,906.925 1025.475,906.925 1025.563,906.838 1031.212,906.838 1035.7,902.35 1036.6,902.35 cw(c1036.827,902.35) 1037.054,902.35 ccw(c1037.281,902.352) 1037.508,902.35 cw(c1037.735,902.35) 1037.962,902.35 ccw(c1038.189,902.352) 1038.416,902.35 cw(c1038.643,902.35) 1038.87,902.35 ccw(c1039.097,902.352) 1039.324,902.35 cw(c1039.551,902.35) 1039.778,902.35 ccw(c1040.005,902.352) 1040.232,902.35 cw(c1040.459,902.35) 1040.686,902.35 ccw(c1040.913,902.352) 1041.14,902.35 cw(c1041.367,902.35) 1041.594,902.35 ccw(c1041.821,902.35) 1042.048,902.35 cw(c1042.275,902.35) 1042.502,902.35 ccw(c1042.729,902.35) 1042.956,902.35 cw(c1043.183,902.35) 1043.41,902.35 ccw(c1043.637,902.35) 1043.864,902.35 cw(c1044.091,902.35) 1044.318,902.35 ccw(c1044.545,902.35) 1044.772,902.35 cw(c1044.999,902.35) 1045.226,902.35 ccw(c1045.453,902.35) 1045.68,902.35 cw(c1045.907,902.35) 1046.134,902.35 ccw(c1046.361,902.35) 1046.588,902.35 cw(c1046.815,902.35) 1047.042,902.35 ccw(c1047.269,902.35) 1047.496,902.35 cw(c1047.723,902.35) 1047.95,902.35 1048.404,902.35 1048.45,902.35 1048.475,902.375 1055.225,909.125 1058.9,909.125 U2.50@1059.575,909.8
"D4_5_P   / CMS4": ?.S36 U2.51 | length 46.8
  Bottom Layer, Bottom w0.2: ?.S36@1024.075,906.425 1025.475,906.425 1025.563,906.512 1031.038,906.512 1035.875,901.675 1037.45,901.675 cw(c1037.677,901.675) 1037.904,901.675 ccw(c1038.131,901.675) 1038.358,901.675 cw(c1038.585,901.675) 1038.812,901.675 ccw(c1039.039,901.675) 1039.266,901.675 cw(c1039.493,901.675) 1039.72,901.675 ccw(c1039.947,901.675) 1040.174,901.675 cw(c1040.401,901.675) 1040.628,901.675 ccw(c1040.855,901.675) 1041.082,901.675 cw(c1041.309,901.675) 1041.536,901.675 ccw(c1041.763,901.675) 1041.99,901.675 1042.125,901.675 1048.235,901.675 1055.36,908.8 U2.51@1063.325,908.8
"D6_7_M   / CMS7": ?.S33 U2.48 | length 46.8
  Bottom Layer, Bottom w0.2: ?.S33@1024.075,908.425 1025.475,908.425 1025.563,908.338 1032.6,908.338 cw(c1032.827,908.338) 1033.054,908.338 ccw(c1033.281,908.338) 1033.508,908.338 cw(c1033.735,908.338) 1033.962,908.338 ccw(c1034.189,908.338) 1034.416,908.338 cw(c1034.643,908.338) 1034.87,908.338 ccw(c1035.097,908.338) 1035.324,908.338 cw(c1035.551,908.338) 1035.778,908.338 ccw(c1036.005,908.338) 1036.232,908.338 cw(c1036.459,908.338) 1036.686,908.338 ccw(c1036.913,908.338) 1037.14,908.338 cw(c1037.367,908.338) 1037.594,908.338 ccw(c1037.821,908.338) 1038.048,908.338 cw(c1038.275,908.338) 1038.502,908.338 ccw(c1038.729,908.338) 1038.956,908.338 cw(c1039.183,908.338) 1039.41,908.338 ccw(c1039.637,908.338) 1039.864,908.338 cw(c1040.091,908.338) 1040.318,908.338 ccw(c1040.545,908.338) 1040.772,908.338 cw(c1040.999,908.338) 1041.226,908.338 ccw(c1041.453,908.338) 1041.68,908.338 cw(c1041.907,908.338) 1042.134,908.338 ccw(c1042.361,908.338) 1042.588,908.338 cw(c1042.815,908.338) 1043.042,908.338 ccw(c1043.269,908.338) 1043.496,908.338 cw(c1043.723,908.338) 1043.95,908.338 ccw(c1044.177,908.338) 1044.404,908.338 cw(c1044.631,908.338) 1044.858,908.338 ccw(c1045.085,908.338) 1045.312,908.338 cw(c1045.539,908.338) 1045.766,908.338 ccw(c1045.993,908.338) 1046.22,908.338 cw(c1046.447,908.338) 1046.674,908.338 ccw(c1046.901,908.338) 1047.128,908.338 cw(c1047.355,908.338) 1047.582,908.338 ccw(c1047.809,908.338) 1048.036,908.338 cw(c1048.263,908.338) 1048.49,908.338 ccw(c1048.717,908.338) 1048.944,908.338 cw(c1049.171,908.338) 1049.398,908.338 ccw(c1049.625,908.338) 1049.852,908.338 1050.2,908.338 1051.962,908.338 1054.725,911.1 1058.79,911.1 1059.515,911.825 cw(c1059.515,911.74) U2.48@1059.575,911.8
"D6_7_P   / CMS6": ?.S34 U2.49 | length 46.9
  Bottom Layer, Bottom w0.2: ?.S34@1024.075,907.925 1025.475,907.925 1025.563,908.012 1031.863,908.012 1032.375,907.5 1033.525,907.5 cw(c1033.752,907.5) 1033.979,907.5 ccw(c1034.206,907.5) 1034.433,907.5 cw(c1034.66,907.5) 1034.887,907.5 ccw(c1035.114,907.5) 1035.341,907.5 cw(c1035.568,907.5) 1035.795,907.5 ccw(c1036.022,907.5) 1036.249,907.5 cw(c1036.476,907.5) 1036.703,907.5 ccw(c1036.93,907.5) 1037.157,907.5 cw(c1037.384,907.5) 1037.611,907.5 ccw(c1037.838,907.5) 1038.065,907.5 cw(c1038.292,907.5) 1038.519,907.5 ccw(c1038.746,907.5) 1038.973,907.5 cw(c1039.2,907.5) 1039.427,907.5 ccw(c1039.654,907.5) 1039.881,907.5 cw(c1040.108,907.5) 1040.335,907.5 ccw(c1040.562,907.5) 1040.789,907.5 cw(c1041.016,907.5) 1041.243,907.5 ccw(c1041.47,907.5) 1041.697,907.5 cw(c1041.924,907.5) 1042.151,907.5 ccw(c1042.378,907.5) 1042.605,907.5 cw(c1042.832,907.5) 1043.059,907.5 ccw(c1043.286,907.5) 1043.513,907.5 cw(c1043.74,907.5) 1043.967,907.5 1043.975,907.5 1051.65,907.5 1054.925,910.775 U2.49@1063.3,910.775 ; U2.49@1063.25,910.725 U2.49@1063.3,910.775 ; U2.49@1063.325,910.775 U2.49@1063.3,910.775 ; U2.49@1063.325,910.8 U2.49@1063.3,910.775
"D8_9_M  / CMS9": ?.S29 U2.44 | length 48.3
  Bottom Layer, Bottom w0.2: ?.S29@1024.075,911.425 1025.475,911.425 1025.563,911.337 1028.575,911.337 1034.163,916.925 1034.525,916.925 cw(c1034.752,916.925) 1034.979,916.925 ccw(c1035.206,916.925) 1035.433,916.925 cw(c1035.66,916.925) 1035.887,916.925 ccw(c1036.114,916.925) 1036.341,916.925 cw(c1036.568,916.925) 1036.795,916.925 ccw(c1037.022,916.925) 1037.249,916.925 cw(c1037.476,916.925) 1037.703,916.925 ccw(c1037.93,916.925) 1038.157,916.925 cw(c1038.384,916.925) 1038.611,916.925 ccw(c1038.838,916.925) 1039.065,916.925 cw(c1039.292,916.925) 1039.519,916.925 ccw(c1039.746,916.925) 1039.973,916.925 cw(c1040.2,916.925) 1040.427,916.925 ccw(c1040.654,916.925) 1040.881,916.925 cw(c1041.108,916.925) 1041.335,916.925 ccw(c1041.562,916.925) 1041.789,916.925 cw(c1042.016,916.925) 1042.243,916.925 ccw(c1042.47,916.925) 1042.697,916.925 cw(c1042.924,916.925) 1043.151,916.925 ccw(c1043.378,916.925) 1043.605,916.925 cw(c1043.832,916.925) 1044.059,916.925 ccw(c1044.286,916.925) 1044.513,916.925 cw(c1044.74,916.925) 1044.967,916.925 ccw(c1045.194,916.925) 1045.421,916.925 cw(c1045.648,916.925) 1045.875,916.925 ccw(c1046.102,916.925) 1046.329,916.925 cw(c1046.556,916.925) 1046.783,916.925 ccw(c1047.01,916.925) 1047.237,916.925 cw(c1047.464,916.925) 1047.691,916.925 ccw(c1047.918,916.925) 1048.145,916.925 cw(c1048.372,916.925) 1048.599,916.925 ccw(c1048.826,916.925) 1049.053,916.925 cw(c1049.28,916.925) 1049.507,916.925 1049.525,916.925 1057.485,916.925 1058.61,915.8 U2.44@1059.575,915.8 ccw(c1059.092,915.317) U2.44@1059.092,916 ; U2.44@1059.225,915.45 1059.575,915.45 U2.44@1059.975,915.85